# Altium PCB ShieldClock.PcbDoc
Units mil, origin at the board's own origin, x right, y up, seen from the top; angles counter-clockwise.
Board outline 3185 x 2350 mil, 2 copper layers (Top Layer, Bottom Layer); 31 components, 29 nets, 171 pads, 18 vias.
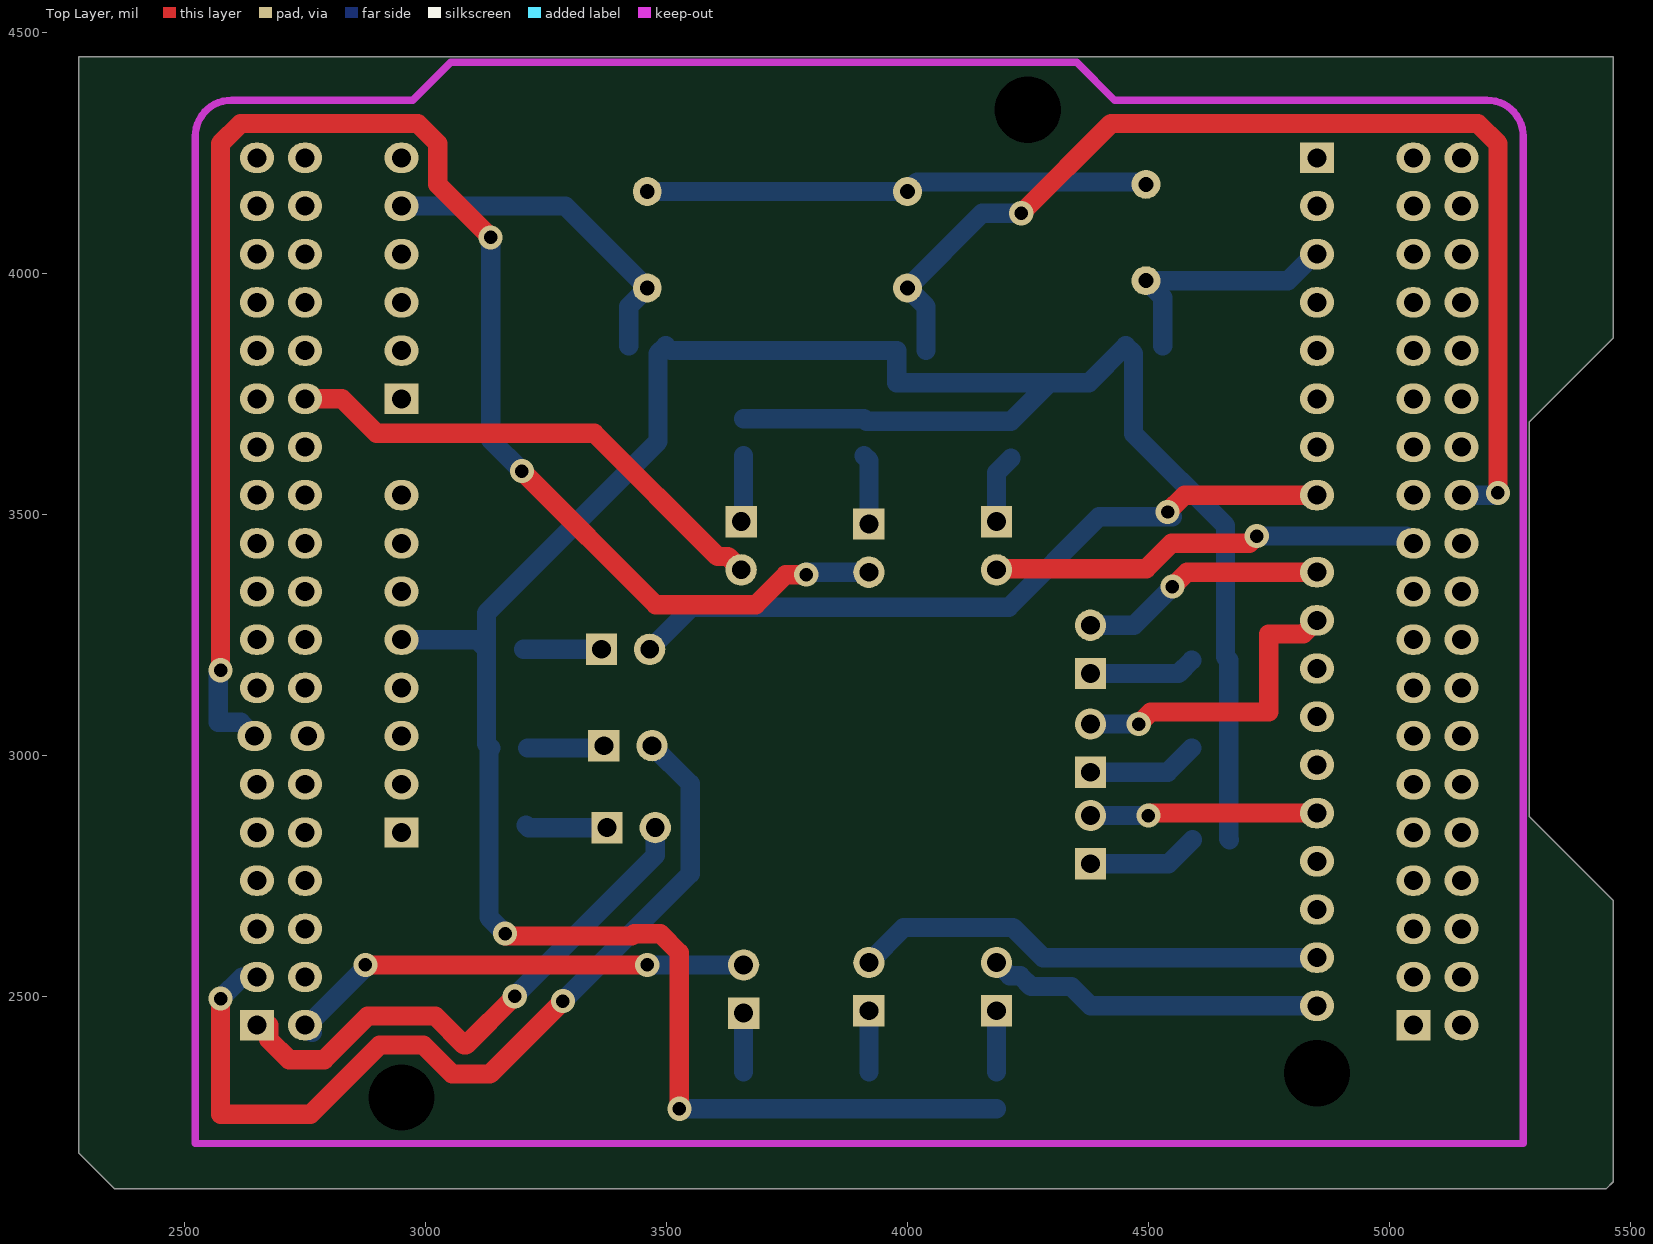
[diagram p0: Top Layer view]
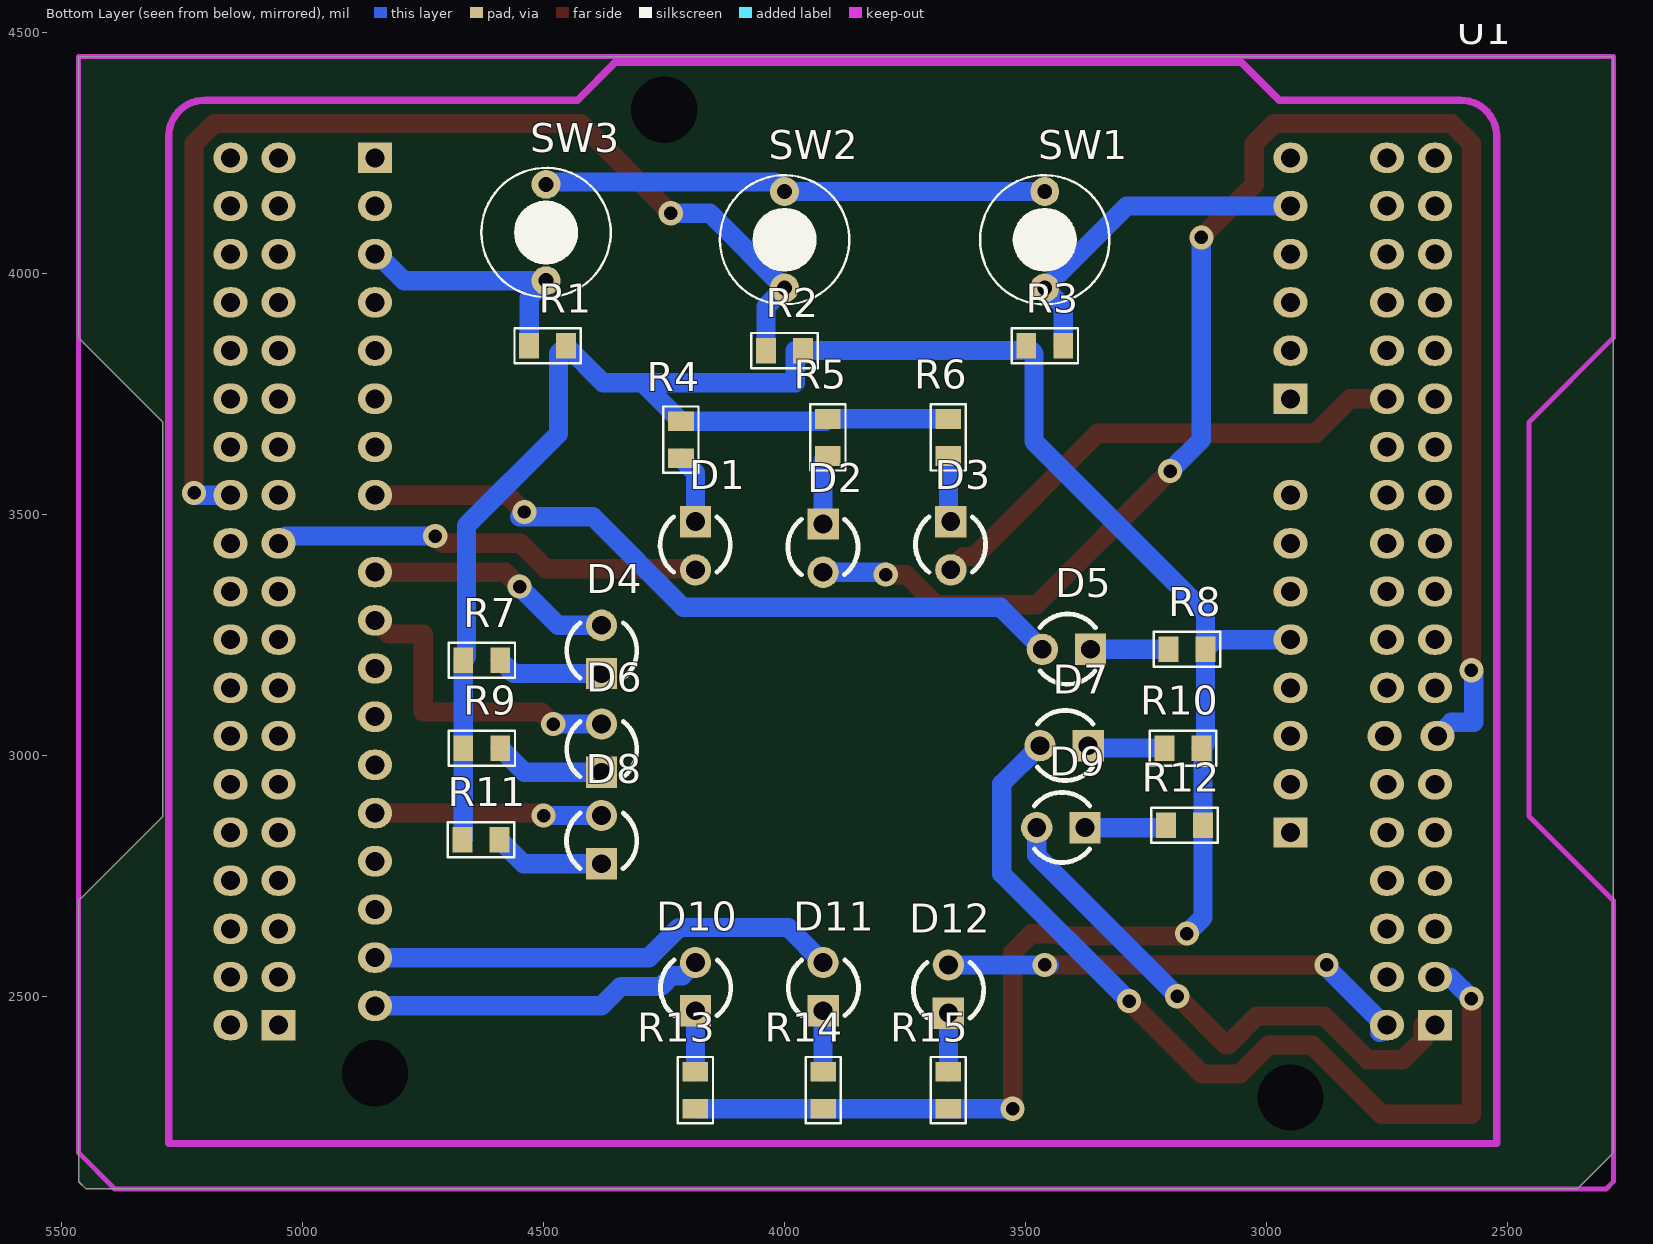
[diagram p1: Bottom Layer view, seen from below]
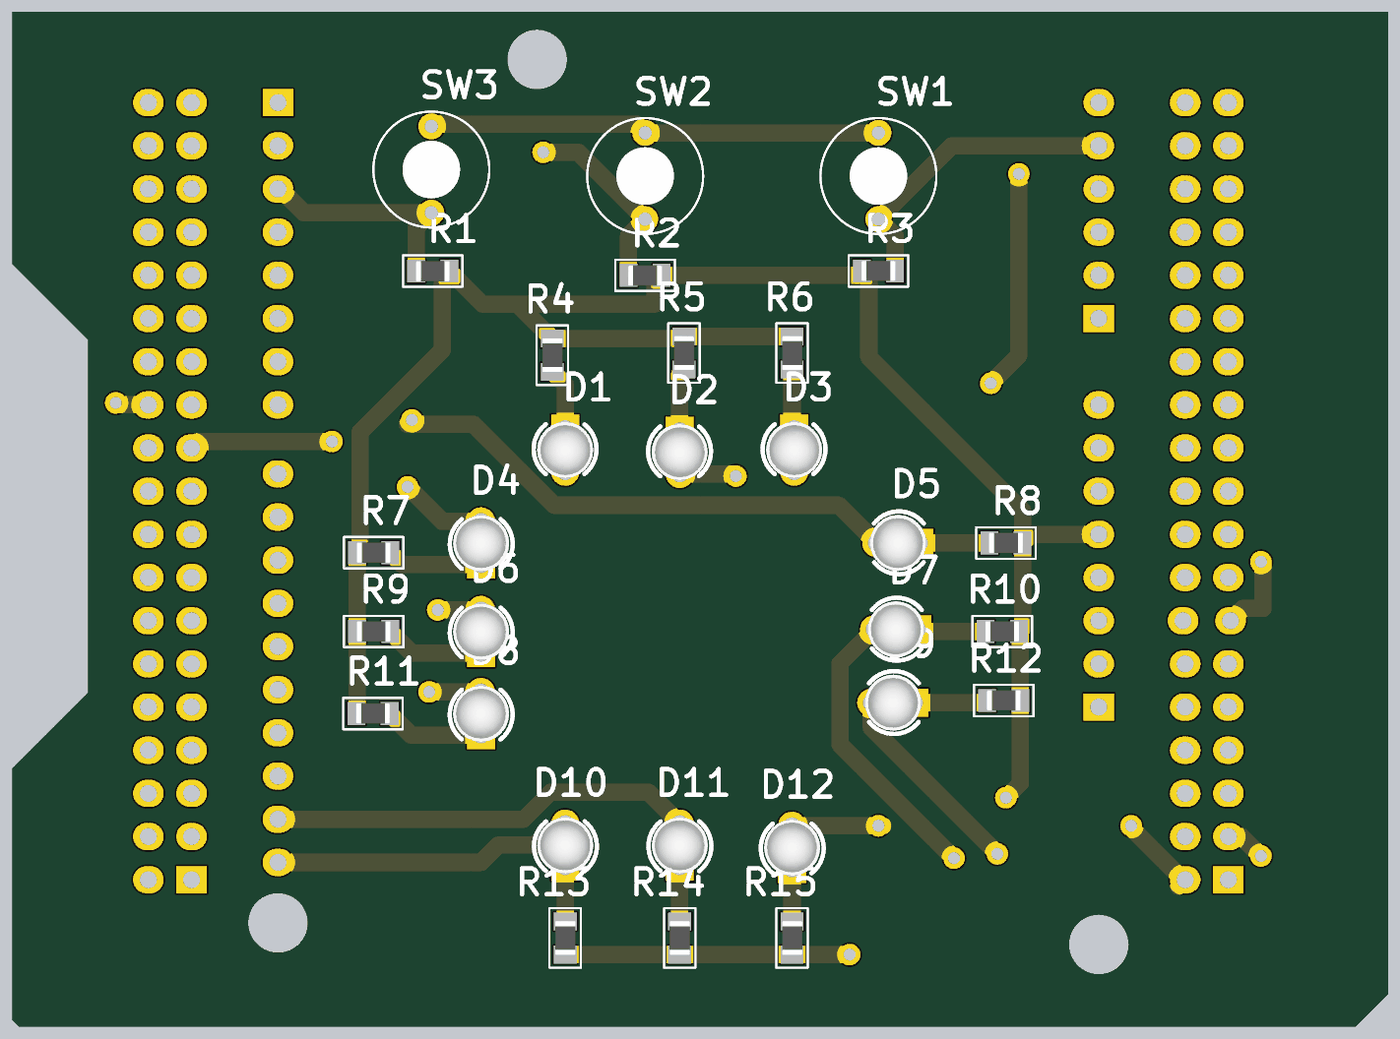
[diagram p2: 3D render of the assembled board from below, using the file's embedded part models]

## Layer stack, top to bottom
Top Solder: solder mask 0.4, Solder Resist, Dk 3.5
Top Layer: signal copper 1.4
Dielectric 1: dielectric 12.6, FR-4, Dk 4.8
Bottom Layer: signal copper 1.4
Bottom Solder: solder mask 0.4, Solder Resist, Dk 3.5

## Board outline
2280,2175 2355,2100 5450,2100 5465,2115 5465,2698.75 5290,2873.75 5290,3691.25 5465,3866.25 5465,4450 2280,4450

## Design rules (kind name [scope] priority, off if disabled: settings)
Clearance [All] p1: gap=20 ignorepadtopadclearanceinfootprint=FALSE
ComponentClearance [InComponent('U1')] p1: gap=0 collisioncheckmode=3 verticalgap=0 showdistances=FALSE
PolygonConnect [All] p1: connectstyle=Relief reliefconductorwidth=10 reliefentries=4 polygonreliefangle="90 Angle" airgapwidth=10
RoutingVias [All] p1: holewidth=28 width=50 viastyle="Through Hole" minholewidth=28 minwidth=50 maxholewidth=28 maxwidth=50
SolderMaskExpansion [All] p1: expansion=4
Width [All] p1: maxlimit=100 minlimit=20 preferedwidth=40
29 further rules are at their usual default settings.

## Components (designator, comment, footprint, x,y, rotation, side; value= is the part's Value field where it differs from the comment)
D1 "Led" "LED 3MM - red" 4185,3435 r270 bottom
D2 "Led" "LED 3MM - red" 3920,3430 r270 bottom
D3 "Led" "LED 3MM - red" 3655,3435 r270 bottom
D4 "Led" "LED 3MM - red" 4379.84,3220 r90 bottom
D5 "Led" "LED 3MM - red" 3415,3220 r0 bottom
D6 "Led" "LED 3MM - red" 4379.84,3015 r90 bottom
D7 "Led" "LED 3MM - red" 3420,3020 r0 bottom
D8 "Led" "LED 3MM - red" 4380,2825 r90 bottom
D9 "Led" "LED 3MM - red" 3426.61,2850 r0 bottom
D10 "Led" "LED 3MM - red" 4185,2520 r90 bottom
D11 "Led" "LED 3MM - red" 3920,2520 r90 bottom
D12 "Led" "LED 3MM - red" 3660,2515 r90 bottom
R1 "10k" "R 0805" 4491.61,3850 r180 bottom
R2 "10k" "R 0805" 4000,3840 r180 bottom
R3 "10k" "R 0805" 3460,3850 r0 bottom
R4 "1k" "R 0805" 4215,3655 r90 bottom
R5 "1k" "R 0805" 3910,3660 r90 bottom
R6 "1k" "R 0805" 3660,3660 r90 bottom
R7 "1k" "R 0805" 4628.39,3197.5 r0 bottom
R8 "1k" "R 0805" 3165,3220 r0 bottom
R9 "1k" "R 0805" 4628.39,3015 r0 bottom
R10 "1k" "R 0805" 3173.39,3015 r0 bottom
R11 "1k" "R 0805" 4630,2825 r0 bottom
R12 "1k" "R 0805" 3170,2855 r0 bottom
R13 "1k" "R 0805" 4185,2305 r90 bottom
R14 "1k" "R 0805" 3920,2305 r90 bottom
R15 "1k" "R 0805" 3660,2305 r90 bottom
SW1 "Button" SW/2/DIP 3460,4070 r90 bottom
SW2 "Button" SW/2/DIP 4000,4070 r90 bottom
SW3 "Button" SW/2/DIP 4495,4085 r90 bottom
U1 "NUCLEO-F103RB" NUCLEO 2522.05,4359.69 r0 bottom locked

## Footprints (in the part's own frame and the unit in brackets; to place one, negate y for a bottom-side part, rotate by r counter-clockwise, add the part's x,y. Pads: shape width x height; smd on the part's side, far side on the other; paste and mask are expansions set on the pad)
"LED 3MM - red" [mil]
  rect 65x65 hole 39: 1(-50,0)
  round 65 hole 39: 2(50,0)
  silkscreen extent -60,-73 55,72, body extent -66,-65 64,65, height 207
NUCLEO [mm]
  oval 1.8x1.6 hole 1: A5_1(59.13,24.88) A5_2(59.13,27.42) A5_3(59.13,29.96) A5_4(59.13,32.5) A5_5(59.13,35.04) A5_6(59.13,37.58) A5_7(59.13,40.12) A5_8(59.13,42.66) A5_9(59.13,45.2) A5_10(59.13,47.74) A6_2(10.87,36.06) A6_3(10.87,33.52) A6_4(10.87,30.98) A6_5(10.87,28.44) A6_6(10.87,25.9) A6_7(10.87,23.36) A6_8(10.87,20.82) A8_2(10.87,13.2) A8_3(10.87,10.66) A8_4(10.87,8.12) A8_5(10.87,5.58) A8_6(10.87,3.04) A9_2(59.13,5.58) A9_3(59.13,8.12) A9_4(59.13,10.66) A9_5(59.13,13.2) A9_6(59.13,15.74) A9_7(59.13,18.28) A9_8(59.13,20.82) M7_2(5.79,48.76) M7_3(3.25,46.22) M7_4(5.79,46.22) M7_5(3.25,43.68) M7_6(5.79,43.68) M7_7(3.25,41.14) M7_8(5.79,41.14) M7_9(3.25,38.6) M7_10(5.79,38.6) M7_11(3.25,36.06) M7_12(5.79,36.06) M7_13(3.123,33.52) M7_14(5.917,33.52) M7_15(3.25,30.98) M7_16(5.79,30.98) M7_17(3.25,28.44) M7_18(5.79,28.44) M7_19(3.25,25.9) M7_20(5.79,25.9) M7_21(3.25,23.36) M7_22(5.79,23.36) M7_23(3.25,20.82) M7_24(5.79,20.82) M7_25(3.25,18.28) M7_26(5.79,18.28) M7_27(3.25,15.74) M7_28(5.79,15.74) M7_29(3.25,13.2) M7_30(5.79,13.2) M7_31(3.25,10.66) M7_32(5.79,10.66) M7_33(3.25,8.12) M7_34(5.79,8.12) M7_35(3.25,5.58) M7_36(5.79,5.58) M7_37(3.25,3.04) M7_38(5.79,3.04) M10_2(66.75,48.76) M10_3(64.21,46.22) M10_4(66.75,46.22) M10_5(64.21,43.68) M10_6(66.75,43.68) M10_7(64.21,41.14) M10_8(66.75,41.14) M10_9(64.21,38.6) M10_10(66.75,38.6) M10_11(64.21,36.06) M10_12(66.75,36.06) M10_13(64.21,33.52) M10_14(66.75,33.52) M10_15(64.21,30.98) M10_16(66.75,30.98) M10_17(64.21,28.44) M10_18(66.75,28.44) M10_19(64.21,25.9) M10_20(66.75,25.9) M10_21(64.21,23.36) M10_22(66.75,23.36) M10_23(64.21,20.82) M10_24(66.75,20.82) M10_25(64.21,18.28) M10_26(66.75,18.28) M10_27(64.21,15.74) M10_28(66.75,15.74) M10_29(64.21,13.2) M10_30(66.75,13.2) M10_31(64.21,10.66) M10_32(66.75,10.66) M10_33(64.21,8.12) M10_34(66.75,8.12) M10_35(64.21,5.58) M10_36(66.75,5.58) M10_37(64.21,3.04) M10_38(66.75,3.04)
  rect 1.8x1.6 hole 1: A6_1(10.87,38.6) A8_1(10.87,15.74) A9_1(59.13,3.04) M7_1(3.25,48.76) M10_1(64.21,48.76)
  round 0 hole 3.5 unplated: HOLD(10.87,52.57) HOLD(43.89,0.5) HOLD(59.13,51.3)
  Keep-Out Layer lines w0.381: 0,55 0,1.905 ccw(c1.905,1.905) 1.905,0 11.46,0 13.46,-2 46.46,-2 48.46,0 68.095,0 ccw(c68.095,1.905) 70,1.905 70,55 0,55
"R 0805" [mm] "Chip Resistor, 2-Leads, Body 2.0x1.3mm, IPC Medium Density"
  rect 1.05x1.35 smd: 1(-0.975,0) 2(0.975,0)
  silkscreen extent -1.75,-0.92 1.75,0.92, body extent -1,-0.61 1,0.59, height 0.5
SW/2/DIP [mil]
  round 60 / inner round 62 / far side round 60 hole 31: 1(-100,0) 2(100,0)
  silkscreen extent -134,-134 134,134, body extent -135,-135 135,135, height 150

## Part data
D1 D2 D3 D4 D5 D6 D7 D8 D9 D10 D11 D12: "Typical LED"
R1 R2 R3 R4 R5 R6 R7 R8 R9 R10 R11 R12 R13 R14 R15: library part Resistor, "Resistor"
SW1 SW2 SW3: library part "SW SPST", "Tact switch 2 pin"
U1: "STM32F103RB, mbed-Enabled Development Nucleo-64 STM32F1 ARM® Cortex®-M3 MCU 32-Bit Embedded Evaluation Board", Manufacturer=STMicroelectronics, BRAND=STMicroelectronics, Manufacturer Product Number=NUCLEO-F103RB, PART NO=NUCLEO-F103RB, STOCK CODE=497-14362-ND, SUPPLIER=digi-key, TYPE="EVAL BRD"

## Via types
v1: diameter 50, hole 28, Top Layer to Bottom Layer, 18 vias

## Nets (pads, with @x,y where several pads share a name; then routed paths per layer and width w, separated by ;. In a path a pad name is that pad's centre, name@x,y a point inside that pad or via, vN(x,y) a via of type N, cw(c..) or ccw(c..) an arc to the next point about the centre after c; other vN are vias at no path point)
1: D3.2 U1.M7_28 | length 1052
  Top Layer w40: U1.M7_28 2826.5,3740 2898,3668.5 3349.93,3668.5 3605.93,3412.5 3627.5,3412.5 D3.2
2: D5.2 U1.A9_8 | length 1537.5
  Top Layer w40: v1(4540,3505) 4575,3540 U1.A9_8
  Bottom Layer w40: D5.2 3552.5,3307.5 4210.03,3307.5 4397.53,3495 4550,3495 v1(4540,3505)
3: D7.2 U1.M7_3 | length 1863.6
  Top Layer w40: v1@2574.57,2495.1 2574.57,2255.43 2575,2255 2761,2255 2904.89,2398.9 2995.11,2398.9 3055.11,2338.9 3133.9,2338.9 v1(3285,2490)
  Bottom Layer w40: v1(2574.55,2495.12) 2619.43,2540 U1.M7_3 ; v1(3285,2490) 3549.11,2754.11 3549.11,2940.89 D7.2
4: D9.2 U1.M7_1 | length 1158
  Top Layer w40: U1.M7_1 2674.57,2440 2674.57,2410.39 2716.45,2368.5 2789.65,2368.5 2880.04,2458.9 3019.96,2458.9 3079.96,2398.9 3083.9,2398.9 v1(3185,2500)
  Bottom Layer w40: v1(3185,2500) 3184.25,2500 3476.61,2792.37 D9.2
5: D12.2 U1.M7_2 | length 995.9
  Top Layer w40: v1(2875,2565) v1(3460,2565)
  Bottom Layer w40: U1.M7_2@2765,2425 U1.M7_2 2755.05,2440 2875,2559.95 v1(2875,2565) ; v1@3450,2565 v1(3460,2565) D12.2
6: D11.2 U1.A5_9 | length 985.9
  Bottom Layer w40: D11.2 3992.5,2642.5 4218.92,2642.5 4281.26,2580.16 U1.A5_9
7: D10.2 U1.A5_10 | length 702.2
  Bottom Layer w40: D10.2 4212.5,2542.5 4234.07,2542.5 4256.41,2520.16 4339.84,2520.16 4379.84,2480.16 U1.A5_10
8: D8.2 U1.A5_6 | length 472.1
  Top Layer w40: v1(4500,2875) 4505.16,2880.16 U1.A5_6
  Bottom Layer w40: D8.2 v1(4500,2875)
9: D6.2 U1.A5_2 | length 654
  Top Layer w40: v1(4480,3065) 4505,3090 4750,3090 4750,3251.65 4821.5,3251.65 U1.A5_2
  Bottom Layer w40: D6.2 v1(4480,3065)
10: D4.2 U1.A5_1 | length 515.8
  Top Layer w40: v1(4550,3350) 4580,3380 4849.84,3380 U1.A5_1
  Bottom Layer w40: D4.2 4470,3270 v1(4550,3350)
11: D1.2 U1.M10_21 | length 900.2
  Top Layer w40: D1.2 4187.5,3387.5 4495.58,3387.5 4548.08,3440 4710,3440 v1(4725,3455)
  Bottom Layer w40: v1(4725,3455) 5035,3455 U1.M10_21
12: D2.2 U1.M7_13 | length 3393.8
  Top Layer w40: v1@2574.57,3176.69 2574.57,4269.61 2616.45,4311.5 2983.55,4311.5 3025.43,4269.61 3025.43,4184.57 v1(3135,4075) ; v1(3200,3590) 3477.5,3312.5 3685.03,3312.5 3747.53,3375 v1(3790,3375)
  Bottom Layer w40: v1(2574.55,3176.67) 2569.55,3171.67 2569.55,3068.5 2616.5,3068.5 U1.M7_13 ; v1(3135,4075) 3135,3655 v1(3200,3590) ; v1(3790,3375) 3790,3380 D2.2
+5: R1.2 R2.2 R3.2 R4.2 R5.2 R6.2 R7.2 R8.1 R9.2 R10.1 R11.2 R12.1 R13.1 R14.1 R15.1 U1.A6_5 | length 5786.5
  Top Layer w40: v1(3165,2630) 3165,2625 3428.08,2625 3433.08,2630 3486.92,2630 3526.61,2590.31 v1(3526.61,2266.61)
  Bottom Layer w40: U1.A6_5 3106.61,3240 R8.1 ; v1(3165,2630) 3131.61,2663.39 R12.1 3131.61,3011.61 R10.1 3126.61,3023.39 R8.1 ; v1(3526.61,2266.61) R15.1 R14.1 R13.1 ; R6.2 R5.2 3915,3693.39 R4.2 4295.04,3773.43 ; R11.2 4666.77,2826.61 R9.2 R7.2 4660,3204.27 4660,3476.92 4469.33,3667.59 4469.33,3833.9 R1.2 4376.65,3773.43 4295.04,3773.43 ; R8.1 3126.61,3295.53 3482.28,3651.2 3482.28,3833.9 R3.2 3508.39,3840 R2.2 3977.72,3840 3977.72,3773.43 4295.04,3773.43
BUTTON1: R3.1 SW1.1 U1.A8_5 | length 716.3
  Bottom Layer w40: U1.A8_5 3290,4140 SW1.1 3421.61,3931.61 R3.1
BUTTON2: R2.1 SW2.1 U1.M10_24 | length 2332.5
  Top Layer w40: v1(4236.13,4125) 4422.62,4311.5 5183.55,4311.5 5225.43,4269.61 v1(5225.43,3544.57)
  Bottom Layer w40: R2.1 4038.39,3931.61 SW2.1 4155,4125 v1(4236.13,4125) ; U1.M10_24 5220.87,3540 v1(5225.43,3544.57)
BUTTON3: R1.1 SW3.1 U1.A9_3 | length 527.3
  Bottom Layer w40: R1.1 4530,3950 SW3.1 4789.95,3985 4844.95,4040 U1.A9_3
GND: SW1.2 SW2.2 SW3.2 | length 1045.4
  Bottom Layer w40: SW1.2 SW2.2 4020,4190 4490,4190 SW3.2
NetD1_1: D1.1 R4.1 | length 144
  Bottom Layer w40: D1.1 4185,3586.61 R4.1
NetD2_1: D2.1 R5.1 | length 145.8
  Bottom Layer w40: R5.1 3920,3611.61 D2.1
NetD3_1: D3.1 R6.1 | length 138.7
  Bottom Layer w40: D3.1 3660,3490 R6.1
NetD4_1: D4.1 R7.1 | length 221.5
  Bottom Layer w40: D4.1 4562.5,3170 R7.1
NetD5_1: D5.1 R8.2 | length 161.6
  Bottom Layer w40: R8.2 D5.1
NetD6_1: D6.1 R9.1 | length 230.9
  Bottom Layer w40: D6.1 4540,2965 R9.1
NetD7_1: D7.1 R10.2 | length 160.3
  Bottom Layer w40: R10.2 3365,3015 D7.1
NetD8_1: D8.1 R11.1 | length 232.3
  Bottom Layer w40: D8.1 4541.61,2775 R11.1
NetD9_1: D9.1 R12.2 | length 170.3
  Bottom Layer w40: R12.2 3213.39,2850 D9.1
NetD10_1: D10.1 R13.2 | length 126.6
  Bottom Layer w40: R13.2 D10.1
NetD11_1: D11.1 R14.2 | length 126.6
  Bottom Layer w40: R14.2 D11.1
NetD12_1: D12.1 R15.2 | length 121.6
  Bottom Layer w40: R15.2 D12.1
pads on no net: U1.A5_3 U1.A5_4 U1.A5_5 U1.A5_7 U1.A5_8 U1.A6_1 U1.A6_2 U1.A6_3 U1.A6_4 U1.A6_6 U1.A6_7 U1.A6_8 U1.A8_1 U1.A8_2 U1.A8_3 U1.A8_4 U1.A8_6 U1.A9_1 U1.A9_2 U1.A9_4 U1.A9_5 U1.A9_6 U1.A9_7 U1.HOLD U1.M7_4 U1.M7_5 U1.M7_6 U1.M7_7 U1.M7_8 U1.M7_9 U1.M7_10 U1.M7_11 U1.M7_12 U1.M7_14 U1.M7_15 U1.M7_16 U1.M7_17 U1.M7_18 U1.M7_19 U1.M7_20 U1.M7_21 U1.M7_22 U1.M7_23 U1.M7_24 U1.M7_25 U1.M7_26 U1.M7_27 U1.M7_29 U1.M7_30 U1.M7_31 U1.M7_32 U1.M7_33 U1.M7_34 U1.M7_35 U1.M7_36 U1.M7_37 U1.M7_38 U1.M10_1 U1.M10_2 U1.M10_3 U1.M10_4 U1.M10_5 U1.M10_6 U1.M10_7 U1.M10_8 U1.M10_9 U1.M10_10 U1.M10_11 U1.M10_12 U1.M10_13 U1.M10_14 U1.M10_15 U1.M10_16 U1.M10_17 U1.M10_18 U1.M10_19 U1.M10_20 U1.M10_22 U1.M10_23 U1.M10_25 U1.M10_26 U1.M10_27 U1.M10_28 U1.M10_29 U1.M10_30 U1.M10_31 U1.M10_32 U1.M10_33 U1.M10_34 U1.M10_35 U1.M10_36 U1.M10_37 U1.M10_38

## Keep-outs
Bottom Layer:
  lines w10: 2280,2115 2280,2698.75 2455,2873.75 2455,3691.25 2280,3866.25 2280,4450 5465,4450 5465,2175 5390,2100 2295,2100 2280,2115